# Altium PCB DWS_Commutator.PcbDoc
Units mm, origin at the board's own origin, x right, y up, seen from the top; angles counter-clockwise.
Board outline 165 x 100.1 mm, 2 copper layers (Top Layer, Bottom Layer); 42 components, 56 nets, 170 pads, 24 vias.
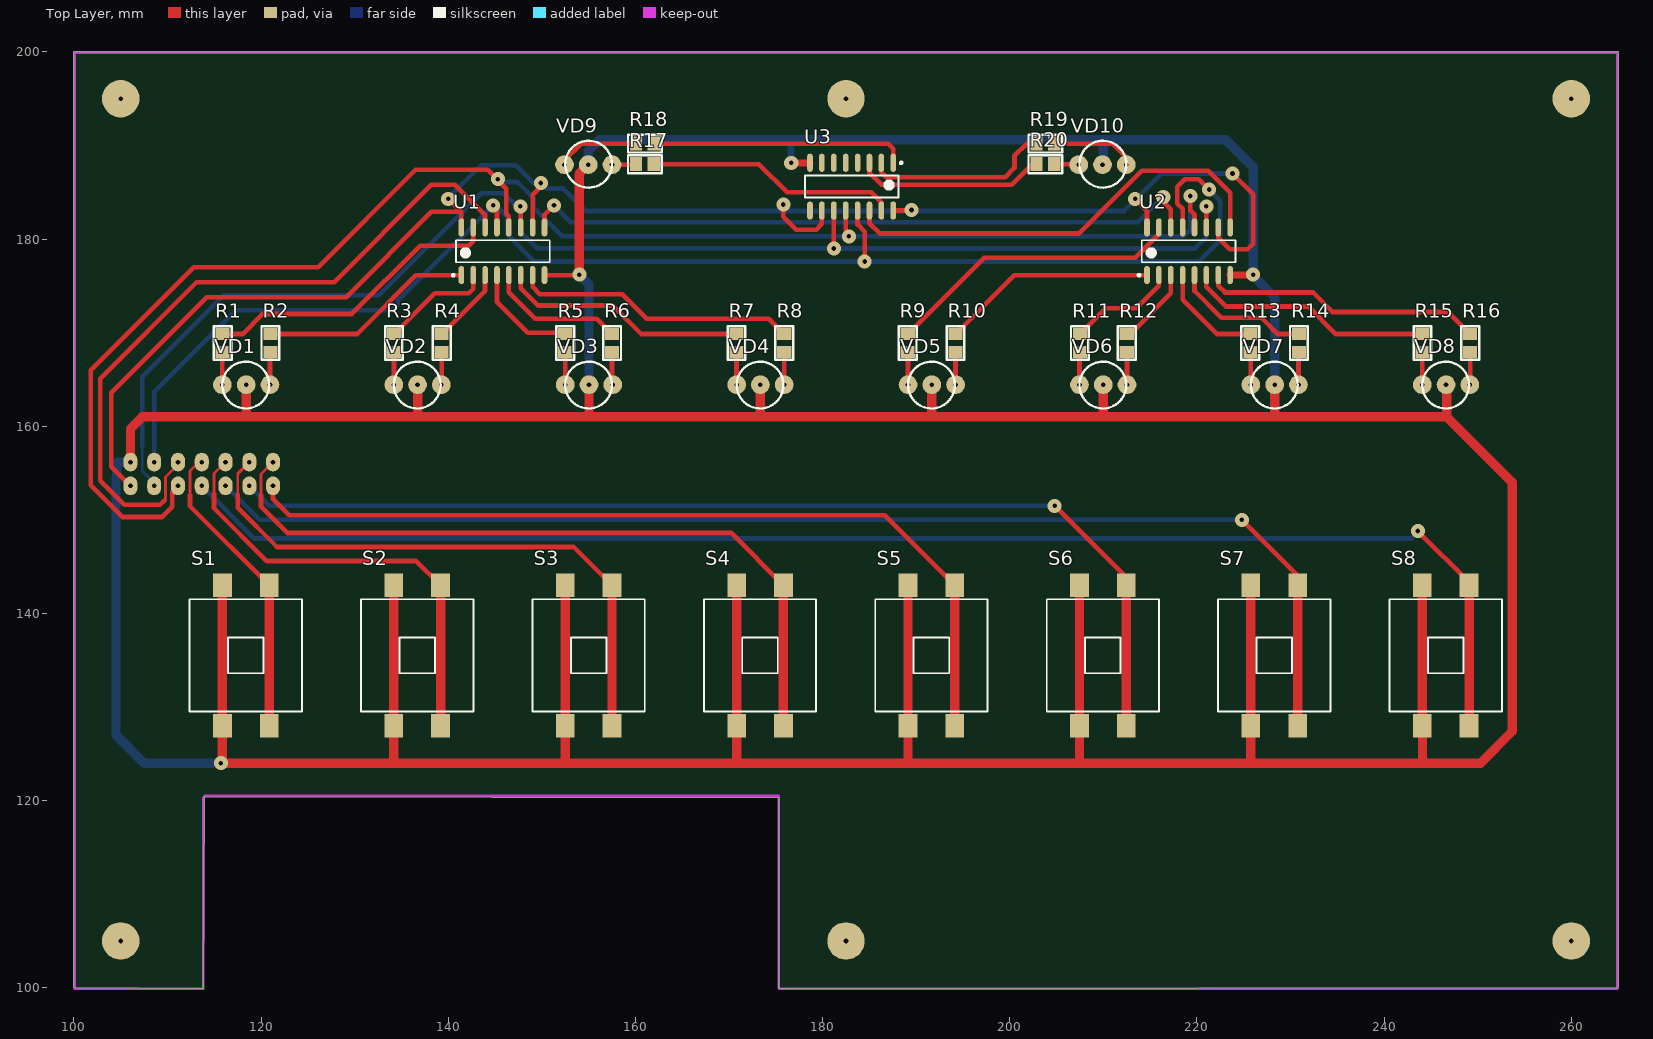
[diagram p0: Top Layer view]
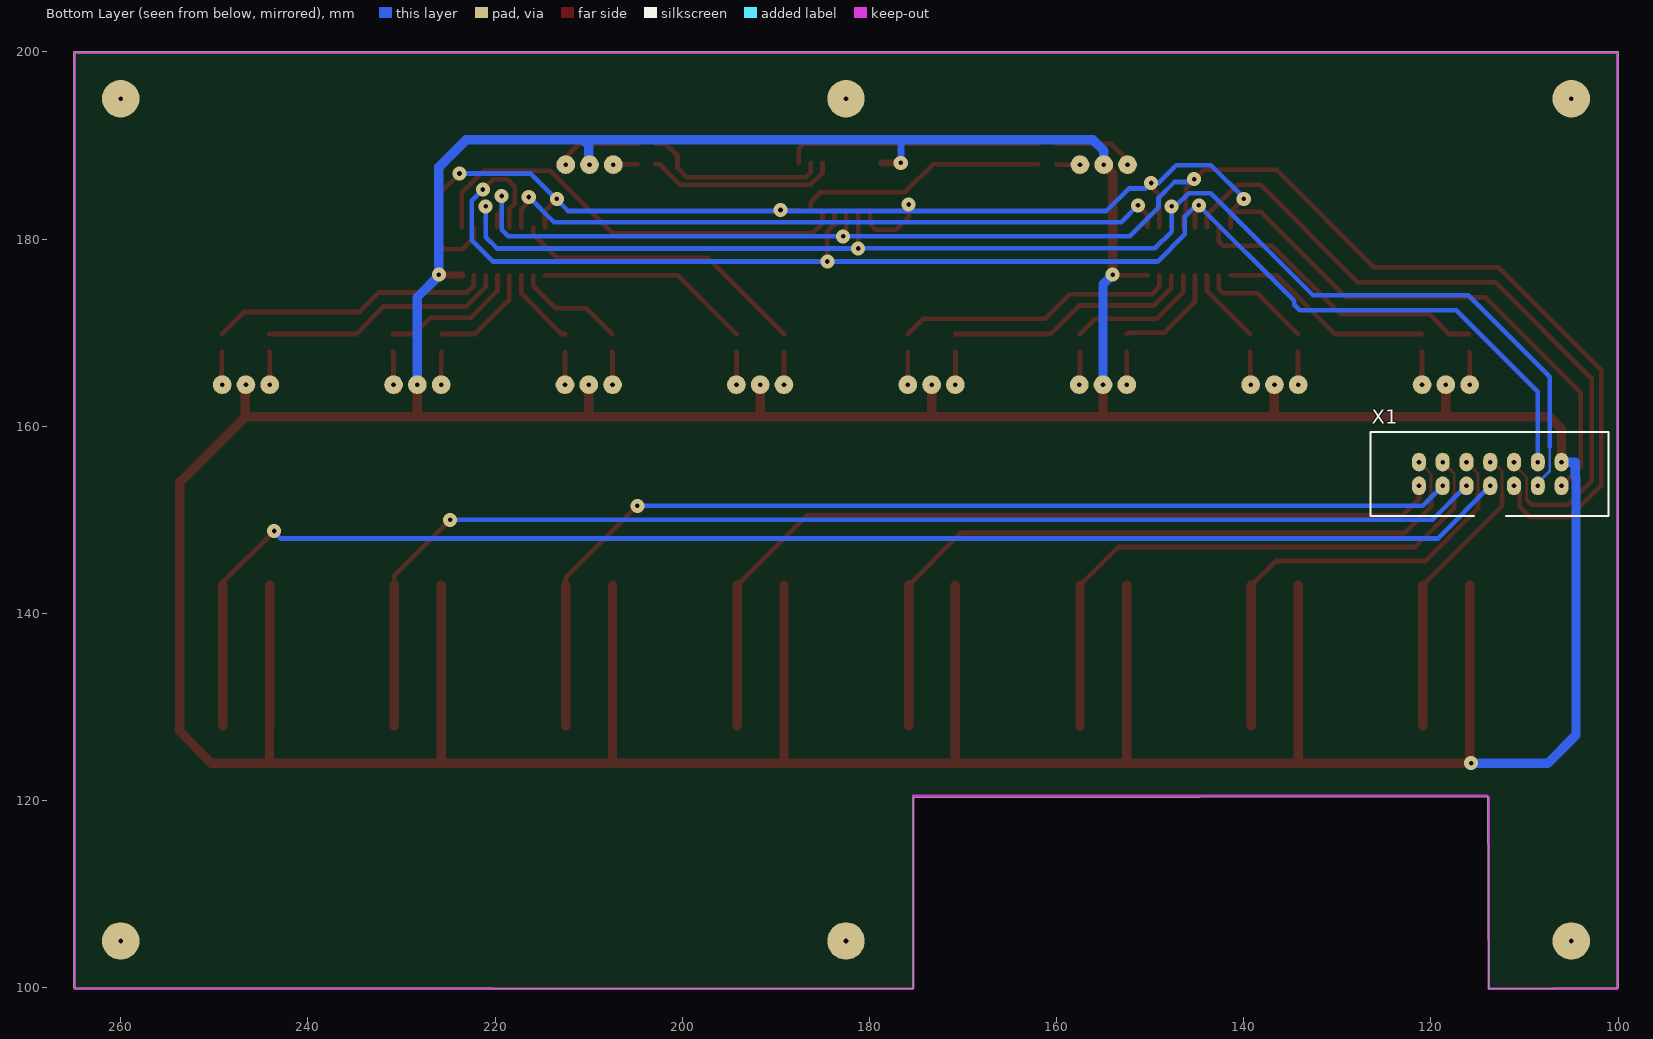
[diagram p1: Bottom Layer view, seen from below]

## Layer stack, top to bottom
Top Layer: signal copper 0.0356
Dielectric: dielectric 0.32, FR-4, Dk 4.8
Bottom Layer: signal copper 0.0356

## Board outline
100,100 100,200 265,200 265,100 175.3,99.9 175.3,120.3 113.9,120.4 113.8,99.9

## Design rules (kind name [scope] priority, off if disabled: settings)
Clearance "Clearance_GND_VCC +3.3" [InNet('GND') vs InNet('VCC')] p1 off: gap=0.2
Clearance Clearance_U3_Trace [(IsTrack  And IsNet)  And InRegion(3815,3770 ,4275 ,4280) vs (IsTrack  And IsNet)  And InRegion(3815,3770 ,4275 ,4280)] p2 off: gap=0.2
Clearance Clearance_QFP_NET [InNet('NetU1_20','NetU1_7','NetU1_6','NetU1_3','NetU1_2','NetU1_1','VCC','NetC3_2','SSCK','NetC5_1','NetC9_1','GND','NetC4_2','NetANT1_1','NetR1_2','NetC1_2')  And InRegion(1311,1988 ,1800 ,2464) vs InNet('NetU1_20','NetU1_7','NetU1_6','NetU1_3','NetU1_2','NetU1_1','VCC','NetC3_2','SSCK','NetC5_1','NetC9_1','GND','NetC4_2','NetANT1_1','NetR1_2')  And InRegion(1311,1988 ,1800 ,2464)] p3 off: gap=0.2
Clearance Clearance_QFP_Pins [InComponent('U1') And IsPad] p4 off: gap=0.2
Clearance Clearance_GND [InPolygon] p5: gap=0.5
Clearance [All] p6: gap=0.3
ComponentClearance ComponentClearance_R1_C10 [InComponent('C10') vs InComponent('R1')] p1 off: gap=0 collisioncheckmode=3 verticalgap=0 showdistances=FALSE
ComponentClearance [All] p2 off: gap=0.3 collisioncheckmode=3 verticalgap=0.3 showdistances=FALSE
HoleSize [All] p1: absolutevalues=TRUE maxlimit=5 minlimit=0.3 maxpercent=80.000 minpercent=20.000
MinimumSolderMaskSliver [All] p1 off: minsoldermaskwidth=0.254
NetAntennae [All] p1: netantennaetolerance=50
PlaneConnect [All] p1: planeconnectstyle=Relief reliefexpansion=0.508 reliefentries=4 reliefconductorwidth=0.3 reliefairgap=0.3
PolygonConnect [All] p1: connectstyle=Relief reliefconductorwidth=0.5 reliefentries=4 polygonreliefangle="90 Angle"
RoutingCorners [All] p1: cornerstyle=45-Degree minsetback=2.54 maxsetback=5
RoutingVias [All] p1: holewidth=0.5 width=1.6 viastyle="Through Hole" minholewidth=0.3 minwidth=1 maxholewidth=1 maxwidth=2
ShortCircuit ShortCircuit_ANT1 [InComponent('ANT1')] p1: allowed=TRUE
ShortCircuit [All] p2: allowed=FALSE
SilkToSilkClearance [All] p1 off: silktosilkclearance=0.3
SilkscreenOverComponentPads [All] p1 off: minsilkscreentomaskgap=0.254
SolderMaskExpansion [All] p1: expansion=0.102
Width [All] p1: maxlimit=5 minlimit=0.2 preferedwidth=0.3
19 further rules are at their usual default settings.

## Components (designator, comment, footprint, x,y, rotation, side; value= is the part's Value field where it differs from the comment)
R1 "RES" C0805 115.9,168.9 r270 top
R2 "RES" C0805 121,168.9 r270 top
R3 "RES" C0805 134.2,168.9 r270 top
R4 "RES" C0805 139.3,168.9 r270 top
R5 "RES" C0805 152.5,168.9 r270 top
R6 "RES" C0805 157.5,168.9 r270 top
R7 "RES" C0805 170.8,168.9 r270 top
R8 "RES" C0805 175.9,168.9 r270 top
R9 "RES" C0805 189.1,168.9 r270 top
R10 "RES" C0805 194.2,168.9 r270 top
R11 "RES" C0805 207.5,168.9 r270 top
R12 "RES" C0805 212.5,168.9 r270 top
R13 "RES" C0805 225.7,168.9 r270 top
R14 "RES" C0805 230.9,168.9 r270 top
R15 "RES" C0805 244.1,168.9 r270 top
R16 "RES" C0805 249.2,168.9 r270 top
R17 "RES" C0805 161,188 r180 top
R18 "RES" C0805 161,190.2 r180 top
R19 "RES" C0805 203.8,190.2 r0 top
R20 "RES" C0805 203.8,188 r0 top
S1 "DTSM81" DTSM81 118.365,135.515 r90 top locked
S2 "DTSM81" DTSM81 136.681,135.515 r90 top locked
S3 "DTSM81" DTSM81 154.998,135.515 r90 top locked
S4 "DTSM81" DTSM81 173.314,135.515 r90 top locked
S5 "DTSM81" DTSM81 191.63,135.515 r90 top locked
S6 "DTSM81" DTSM81 209.946,135.515 r90 top locked
S7 "DTSM81" DTSM81 228.263,135.515 r90 top locked
S8 "DTSM81" DTSM81 246.579,135.515 r90 top locked
U1 "74HC595D" SO-16 145.84,178.7 r90 top
U2 "74HC595D" SO-16 219.105,178.7 r90 top
U3 "74HC595D" SO-16 183.1,185.6 r270 top
VD1 "LIGHTDIODE2" LIGHTDIODE2 118.365,164.403 r180 top locked
VD2 "LIGHTDIODE2" LIGHTDIODE2 136.681,164.403 r180 top locked
VD3 "LIGHTDIODE2" LIGHTDIODE2 154.998,164.403 r180 top locked
VD4 "LIGHTDIODE2" LIGHTDIODE2 173.314,164.403 r180 top locked
VD5 "LIGHTDIODE2" LIGHTDIODE2 191.63,164.403 r180 top locked
VD6 "LIGHTDIODE2" LIGHTDIODE2 209.946,164.403 r180 top locked
VD7 "LIGHTDIODE2" LIGHTDIODE2 228.263,164.403 r180 top locked
VD8 "LIGHTDIODE2" LIGHTDIODE2 246.579,164.403 r180 top locked
VD9 "LIGHTDIODE2" LIGHTDIODE2 154.998,188 r0 top locked
VD10 "LIGHTDIODE2" LIGHTDIODE2 209.946,188 r0 top locked
X1 "IDC-14M" IDC-14M 113.6,154.9 r90 bottom

## Footprints (in the part's own frame and the unit in brackets; to place one, negate y for a bottom-side part, rotate by r counter-clockwise, add the part's x,y. Pads: shape width x height; smd on the part's side, far side on the other; paste and mask are expansions set on the pad)
C0805 [mm]
  rect 1.3x1.5 smd: 1(-0.95,0) 2(0.95,0)
  silkscreen extent -1.8,-0.95 1.8,0.95
DTSM81 [mm]
  rect 2.5x2 smd: 1(-7.5,2.5) 1(7.5,2.5) 2(-7.5,-2.5) 2(7.5,-2.5)
  silkscreen extent -6,-6 6,6
IDC-14M [mm]
  oval 2x1.5 hole 0.5: 1(-1.27,7.68) 2(1.27,7.68) 3(-1.27,5.14) 4(1.27,5.14) 5(-1.27,2.6) 6(1.27,2.6) 7(-1.27,0.06) 8(1.27,0.06) 9(-1.27,-2.48) 10(1.27,-2.48) 11(-1.27,-5.02) 12(1.27,-5.02) 13(-1.27,-7.56) 14(1.27,-7.56)
  silkscreen extent -4.5,-12.58 4.5,12.85
LIGHTDIODE2 [mm]
  round 2 hole 0.5: 1(-0.04,-0.04) 2(-2.58,-0.04) 3(2.5,-0.04)
  silkscreen extent -2.5,-2.5 2.5,2.5
SO-16 [mm]
  oval 1.95x0.6 smd: 1(-2.55,4.445) 2(-2.55,3.175) 3(-2.55,1.905) 4(-2.55,0.635) 5(-2.55,-0.635) 6(-2.55,-1.905) 7(-2.55,-3.175) 8(-2.55,-4.445) 9(2.55,-4.445) 10(2.55,-3.175) 11(2.55,-1.905) 12(2.55,-0.635) 13(2.55,0.635) 14(2.55,1.905) 15(2.55,3.175) 16(2.55,4.445)
  silkscreen extent -2.67,-5 1.17,5.42, body extent -3.75,-5 3.75,5, height 1.75

## Part data
R1 R2 R3 R4 R5 R6 R7 R8 R9 R10 R11 R12 R13 R14 R15 R16 R17 R18 R19 R20: "Resistor"
U1 U2 U3: library part 74HC595

## Free pads (board coordinates)
  round 4 hole 0.5 unplated mask+0.102: 0(105,105) 1(105,195) 2(182.5,195) 3(260,195) 4(260,105) 5(182.5,105)

## Via types
v1: diameter 1.5, hole 0.5, Top Layer to Bottom Layer, 24 vias

## Nets (pads, with @x,y where several pads share a name; then routed paths per layer and width w, separated by ;. In a path a pad name is that pad's centre, name@x,y a point inside that pad or via, vN(x,y) a via of type N, cw(c..) or ccw(c..) an arc to the next point about the centre after c; other vN are vias at no path point)
GND: S1.1 S2.1 S3.1 S4.1 S5.1 S6.1 S7.1 S8.1 U1.8 U2.8 U3.8 VD1.1 VD2.1 VD3.1 VD4.1 VD5.1 VD6.1 VD7.1 VD8.1 VD9.1 VD10.1 X1.14 | length 679.9
  Top Layer w0.5: U1.8 153.95,176.15 v1(154,176.2)
  Top Layer w0.75: v1(176.65,188.15) U3.8 ; U2.8 225.95,176.15 v1(226,176.2)
  Top Layer w1: X1.14 106.04,159.74 107.3,161 118.3,161 ; S1.1@115.865,143.015 115.865,128.015 115.865,124.165 v1(115.7,124) 134.05,124 ; VD1.1 118.405,161.105 118.3,161 ; S2.1@134.181,143.015 134.181,128.015 134.181,124.131 134.05,124 ; VD2.1 136.721,161.021 136.7,161 ; S3.1@152.498,143.015 152.498,128.015 152.498,124.098 152.4,124 ; v1(154,176.2) 154,186.996 154.958,187.954 VD9.1 ; 155.038,161.138 VD3.1 ; 170.814,124.214 170.814,128.015 S4.1@170.814,143.015 ; VD4.1 173.354,161.054 173.3,161 ; S5.1@189.13,143.015 189.13,128.015 189.13,124.13 189,124 ; VD5.1 191.67,161.07 191.6,161 ; S6.1@207.446,143.015 207.446,128.015 207.446,124.146 207.3,124 ; VD6.1 209.986,161.014 ; S7.1@225.763,143.015 225.763,128.015 225.763,124.163 225.6,124 ; 228.303,161.103 VD7.1 ; S8.1@244.079,143.015 244.079,128.015 244.1,127.994 244.1,124 ; VD8.1 246.7,164.362 246.7,161 ; 118.3,161 136.7,161 ; 134.05,124 152.4,124 ; 136.7,161 173.3,161 ; 152.4,124 189,124 ; 173.3,161 191.6,161 ; 189,124 207.3,124 ; 191.6,161 210,161 209.986,161.014 ; 207.3,124 225.6,124 ; 209.986,161.014 246.686,161.014 246.7,161 ; 225.6,124 244.1,124 ; 244.1,124 250.3,124 253.7,127.4 253.7,154 246.7,161
  Bottom Layer w0.75: 176.6,190.6 176.6,188.2 v1(176.65,188.15)
  Bottom Layer w1: X1.14 104.57,156.17 104.57,154.602 104.49,154.522 104.49,127.01 107.5,124 v1(115.7,124) ; v1(154,176.2) 155.038,175.162 VD3.1 ; VD9.1 154.958,189.458 156.1,190.6 176.6,190.6 210.6,190.6 ; VD10.1 210,188.054 210,190 210.6,190.6 ; VD7.1 228.303,173.797 226,176.1 v1(226,176.2) 226,187.7 223.1,190.6 210.6,190.6
NetR1_1: R1.1 U1.15 | length 32.4
  Top Layer w0.5: R1.1 118.05,169.85 120.2,172 129.7,172 137,179.3 142.2,179.3 142.665,179.764 U1.15
NetR1_2: R1.2 VD1.3 | length 3.5
  Top Layer w0.5: VD1.3 115.865,167.915 R1.2
NetR2_1: R2.1 U1.1 | length 23
  Top Layer w0.5: R2.1 130.25,169.85 136.55,176.15 U1.1
NetR2_2: R2.2 VD1.2 | length 3.5
  Top Layer w0.5: VD1.2 120.945,167.895 R2.2
NetR3_1: R3.1 U1.2 | length 11.9
  Top Layer w0.5: R3.1 138.55,174.2 142.2,174.2 142.665,174.664 U1.2
NetR3_2: R3.2 VD2.3 | length 3.5
  Top Layer w0.5: VD2.3 134.2,164.462 R3.2
NetR4_1: R4.1 U1.3 | length 8.2
  Top Layer w0.5: R4.1 143.935,174.484 U1.3
NetR4_2: R4.2 VD2.2 | length 3.5
  Top Layer w0.5: VD2.2 139.3,164.482 R4.2
NetR5_1: R5.1 U1.4 | length 11.6
  Top Layer w0.5: U1.4 145.205,173.296 148.5,170 152.35,170 R5.1
NetR5_2: R5.2 VD3.3 | length 3.5
  Top Layer w0.5: VD3.3 152.5,164.445 R5.2
NetR6_1: R6.1 U1.5 | length 14.7
  Top Layer w0.5: U1.5 146.475,174.325 149.3,171.5 155.85,171.5 R6.1
NetR6_2: R6.2 VD3.2 | length 3.5
  Top Layer w0.5: R6.2 157.5,164.521 VD3.2
NetR7_1: R7.1 U1.6 | length 26.5
  Top Layer w0.5: U1.6 147.745,174.756 149.6,172.9 157.6,172.9 160.65,169.85 R7.1
NetR7_2: R7.2 VD4.3 | length 3.5
  Top Layer w0.5: R7.2 170.8,164.457 VD4.3
NetR8_1: R8.1 U1.7 | length 30.2
  Top Layer w0.5: U1.7 149.015,174.885 149.8,174.1 158.6,174.1 161.2,171.5 174.25,171.5 R8.1
NetR8_2: R8.2 VD4.2 | length 3.5
  Top Layer w0.5: VD4.2 175.9,164.449 R8.2
NetR9_1: R9.1 U2.15 | length 32
  Top Layer w0.5: R9.1 197.25,178 213.4,178 215.93,180.53 U2.15
NetR9_2: R9.2 VD5.3 | length 3.5
  Top Layer w0.5: R9.2 189.13,167.92 VD5.3
NetR10_1: R10.1 U2.1 | length 23.1
  Top Layer w0.5: R10.1 200.5,176.15 U2.1
NetR10_2: R10.2 VD5.2 | length 3.5
  Top Layer w0.5: R10.2 194.21,167.94 VD5.2
NetR11_1: R11.1 U2.2 | length 11.7
  Top Layer w0.5: R11.1 210.25,172.6 213.5,172.6 215.93,175.03 U2.2
NetR11_2: R11.2 VD6.3 | length 3.5
  Top Layer w0.5: VD6.3 207.446,167.896 R11.2
NetR12_1: R12.1 U2.3 | length 8.5
  Top Layer w0.5: R12.1 212.85,169.85 217.2,174.2 U2.3
NetR12_2: R12.2 VD6.2 | length 3.5
  Top Layer w0.5: R12.2 212.526,167.924 VD6.2
NetR13_1: R13.1 U2.4 | length 11.4
  Top Layer w0.5: U2.4 218.47,173.53 222.15,169.85 R13.1
NetR13_2: R13.2 VD7.3 | length 3.5
  Top Layer w0.5: R13.2 225.763,167.887 VD7.3
NetR14_1: R14.1 U2.5 | length 14.8
  Top Layer w0.5: U2.5 219.74,174.46 222.6,171.6 226.9,171.6 228.65,169.85 R14.1
NetR14_2: R14.2 VD7.2 | length 3.5
  Top Layer w0.5: VD7.2 230.843,167.893 R14.2
NetR15_1: R15.1 U2.6 | length 26.4
  Top Layer w0.5: U2.6 221.01,174.89 223.1,172.8 231.9,172.8 234.85,169.85 R15.1
NetR15_2: R15.2 VD8.3 | length 3.5
  Top Layer w0.5: VD8.3 244.079,167.929 R15.2
NetR16_1: R16.1 U2.7 | length 30.2
  Top Layer w0.5: U2.7 222.28,175.02 223,174.3 232.4,174.3 234.5,172.2 246.85,172.2 R16.1
NetR16_2: R16.2 VD8.2 | length 3.5
  Top Layer w0.5: VD8.2 249.2,164.484 R16.2
NetR17_1: R17.1 U3.15 | length 26.9
  Top Layer w0.5: R17.1 173.2,188 176.2,185 185.2,185 186.275,183.925 U3.15
NetR17_2: R17.2 VD9.3 | length 2.6
  Top Layer w0.5: VD9.3 160.01,187.96 R17.2
NetR18_1: R18.1 U3.1 | length 27.3
  Top Layer w0.5: R18.1 187,190.2 187.545,189.655 U3.1
NetR18_2: R18.2 VD9.2 | length 8.8
  Top Layer w0.5: VD9.2 152.418,188.418 154.2,190.2 R18.2
NetR19_1: R19.1 U3.2 | length 20.1
  Top Layer w0.5: U3.2 186.275,187.125 186.8,186.6 199.5,186.6 200.5,187.6 200.5,188.9 201.8,190.2 R19.1
NetR19_2: R19.2 VD10.3 | length 9.1
  Top Layer w0.5: R19.2 211,190.2 212.446,188.754 VD10.3
NetR20_1: R20.1 U3.3 | length 20.3
  Top Layer w0.5: U3.3 185.005,187.095 186.3,185.8 200.2,185.8 202.4,188 R20.1
NetR20_2: R20.2 VD10.2 | length 2.6
  Top Layer w0.5: R20.2 207.326,188 VD10.2
NetS1_2: S1.2 X1.8 | length 32.4
  Top Layer w0.3: 112.4,152.6 112.4,155.2 113.37,156.17 X1.8
  Top Layer w0.5: 112.4,152.6 112.4,151.48 S1.2@120.865,143.015
  Top Layer w1: S1.2@120.865,128.015 S1.2@120.865,143.015
NetS2_2: S2.2 X1.6 | length 48.1
  Top Layer w0.3: 114.971,152.771 114.971,154.941 X1.6
  Top Layer w0.5: 114.971,152.771 114.971,151.229 120.6,145.6 136.596,145.6 S2.2@139.181,143.015
  Top Layer w1: S2.2@139.181,128.015 S2.2@139.181,143.015
NetS3_2: S3.2 X1.4 | length 63.8
  Top Layer w0.3: 117.5,152.7 117.5,154.93 X1.4
  Top Layer w0.5: 117.5,152.7 117.5,151.3 121.7,147.1 153.413,147.1 S3.2@157.498,143.015
  Top Layer w1: S3.2@157.498,128.015 S3.2@157.498,143.015
NetS4_2: S4.2 X1.2 | length 79.6
  Top Layer w0.3: 120,152.6 120,154.89 X1.2
  Top Layer w0.5: 120,152.6 120,151.4 122.8,148.6 170.229,148.6 S4.2@175.814,143.015
  Top Layer w1: S4.2@175.814,128.015 S4.2@175.814,143.015
NetS5_2: S5.2 X1.1 | length 93.1
  Top Layer w0.5: X1.1 121.28,152.22 123,150.5 186.645,150.5 S5.2@194.13,143.015
  Top Layer w1: S5.2@194.13,128.015 S5.2@194.13,143.015
NetS6_2: S6.2 X1.3 | length 113.6
  Top Layer w0.5: v1(204.8,151.5) 212.446,143.854 S6.2@212.446,143.015
  Top Layer w1: S6.2@212.446,128.015 S6.2@212.446,143.015
  Bottom Layer w0.5: X1.3 120.87,151.5 v1(204.8,151.5)
NetS7_2: S7.2 X1.5 | length 134.6
  Top Layer w0.5: v1(224.8,150) 230.763,144.037 S7.2@230.763,143.015
  Top Layer w1: S7.2@230.763,128.015 S7.2@230.763,143.015
  Bottom Layer w0.5: X1.5 119.83,150 v1(224.8,150)
NetS8_2: S8.2 X1.7 | length 155.7
  Top Layer w0.5: v1(243.6,148.8) 249.079,143.321 S8.2@249.079,143.015
  Top Layer w1: S8.2@249.079,128.015 S8.2@249.079,143.015
  Bottom Layer w0.5: X1.7 119.29,148 242.9,148 243.6,148.7 v1(243.6,148.8)
NetU1_9: U1.9 U2.14 | length 73.3
  Top Layer w0.5: U1.9 150.285,182.584 v1(151.3,183.6) ; v1(216.4,184.5) 216.4,184 217.2,183.2 U2.14
  Bottom Layer w0.5: v1(151.3,183.6) 153.1,181.8 213.7,181.8 v1(216.4,184.5)
NetU1_11: U1.11 U2.11 U3.11 X1.11 | length 150.4
  Top Layer w0.5: v1(147.7,183.5) 147.745,183.455 U1.11 ; U3.11 181.195,179.005 v1(181.2,179) ; v1(221,183.5) 221,181.26 U2.11
  Bottom Layer w0.3: 107.3,157.8 107.3,155.2 108.58,153.92 X1.11
  Bottom Layer w0.5: 107.3,157.8 107.3,165.3 116,174 132.6,174 143.515,184.915 145.885,184.915 147.3,183.5 v1(147.7,183.5) 147.7,180.8 149.491,179.009 v1@181.2,179.009 ; v1(181.2,179) v1@181.2,179.009 ; v1(221,183.5) 221,180.209 219.791,179 181.209,179 v1@181.2,179.009
NetU1_12: U1.12 U2.12 U3.12 X1.9 | length 171
  Top Layer w0.5: X1.9 110.5,153.01 110.5,151.4 109.4,150.3 105.2,150.3 101.8,153.7 101.8,166 112.8,177 126.1,177 136.5,187.4 144.2,187.4 146.2,185.4 146.2,182.7 146.475,182.426 U1.12 ; U3.12 182.465,180.635 v1(182.8,180.3) ; v1(219.3,184.6) 219.3,183.1 219.74,182.66 U2.12
  Bottom Layer w0.5: v1@145.3,186.1 147.4,186.1 149.1,184.4 149.1,183.4 152.2,180.3 218.6,180.3 219.3,181 v1(219.3,184.6)
  other v1: 145.3,186.4
NetU1_13: U1.13 U2.13 U3.13 X1.12 | length 157.7
  Top Layer w0.5: v1(144.8,183.6) 145.1,183.6 145.205,183.496 U1.13 ; U3.13 183.735,181.565 184.5,180.8 v1(184.5,177.6) ; U2.13 218.47,183.23 217.9,183.8 217.9,185.6 218.7,186.4 220.2,186.4 v1(221.3,185.3)
  Bottom Layer w0.5: X1.12 108.58,163.68 117.3,172.4 134,172.4 134.6,173 134.6,173.4 144.95,183.75 146.3,182.4 146.3,180.5 149.2,177.6 v1(184.5,177.6) 220.2,177.6 222.5,179.9 222.5,184.1 v1(221.3,185.3)
NetU1_14: U1.14 X1.10 | length 76.1
  Top Layer w0.3: 109.7,152.1 109.78,152.18 109.78,154.58 111.12,155.92 X1.10
  Top Layer w0.5: 109.7,152.1 109.2,151.6 105.4,151.6 102.8,154.2 102.8,165.1 113.1,175.4 127.8,175.4 138.2,185.8 140.7,185.8 143.935,182.565 U1.14
NetU2_9: U2.9 U3.14 | length 47.8
  Top Layer w0.5: U3.14 185.005,181.695 186.1,180.6 207.4,180.6 214.1,187.3 221.2,187.3 223.55,184.95 U2.9
VCC: U1.10 U1.16 U2.10 U2.16 U3.10 U3.16 X1.13 | length 181.5
  Top Layer w0.5: X1.13 104,155.67 104,163.6 114.2,173.8 129.1,173.8 138.205,182.905 141.395,182.905 ; v1(140,184.3) 141.395,182.905 ; U1.16 141.395,182.905 ; U1.10 149.015,184.714 149.9,185.6 v1(149.9,186) ; v1(175.8,183.7) 175.8,182.4 177.2,181 179.3,181 179.925,181.625 U3.10 ; U3.16 189.45,183.05 v1(189.5,183.1) ; v1(213.4,184.3) 214.66,183.04 U2.16 ; U2.10 222.28,180.12 223.5,178.9 225.4,178.9 226,179.5 226,184.8 v1(223.8,187)
  Bottom Layer w0.5: v1(140,184.3) 139.95,184.35 143.5,187.9 147.2,187.9 149.1,186 v1(149.9,186) 150.5,185.4 152.3,185.4 154.7,183 175.8,183 v1@189.5,183 ; v1(189.5,183.1) v1@189.5,183 ; v1(213.4,184.3) v1@213.45,184.25 ; v1(223.8,187) 216.2,187 v1@213.45,184.25 ; v1@189.5,183 212.2,183 v1@213.45,184.25
pads on no net: U3.4 U3.5 U3.6 U3.7 U3.9

## Keep-outs
Keep-Out Layer:
  lines w0.254: 100.076,99.9 100.076,199.898 135.89,199.898 169.545,199.898 237.49,199.898 264.922,199.898 264.922,131.318 264.922,104.013 264.922,99.9 175.4,99.9 175.3,100 175.3,120.5 114,120.5 113.8,120.3 113.8,99.9 100.076,99.9